# Altium PCB CumLED.PcbDoc
Units mil, origin at the board's own origin, x right, y up, seen from the top; angles counter-clockwise.
Board outline 2755.91 x 2755.91 mil, 2 copper layers (Top Layer, Bottom Layer); 7 components, 9 nets, 17 pads, 0 vias.
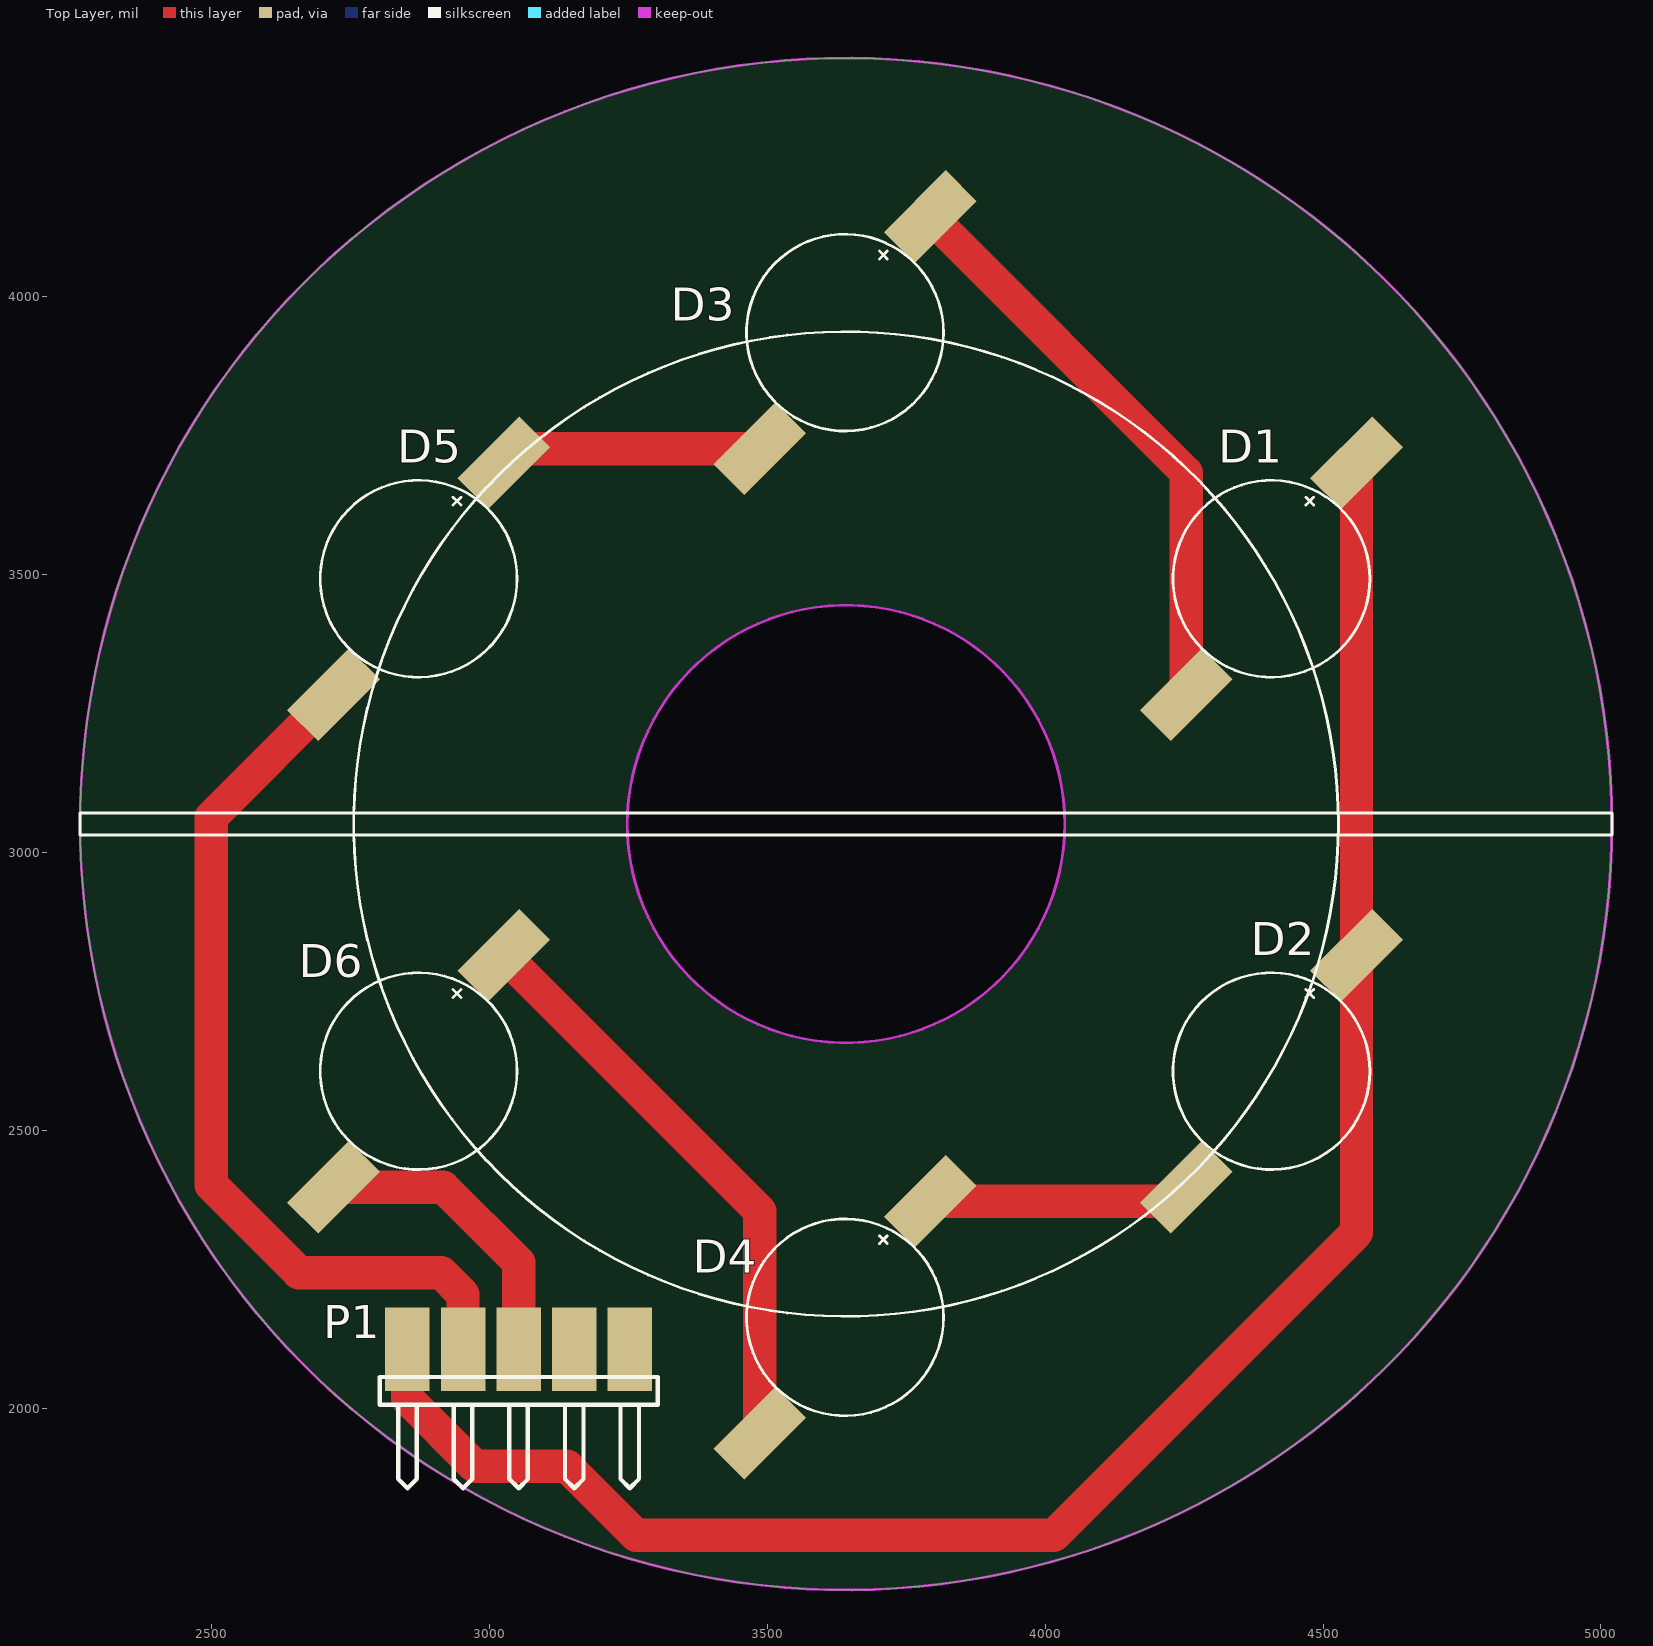
[diagram p0: Top Layer view]
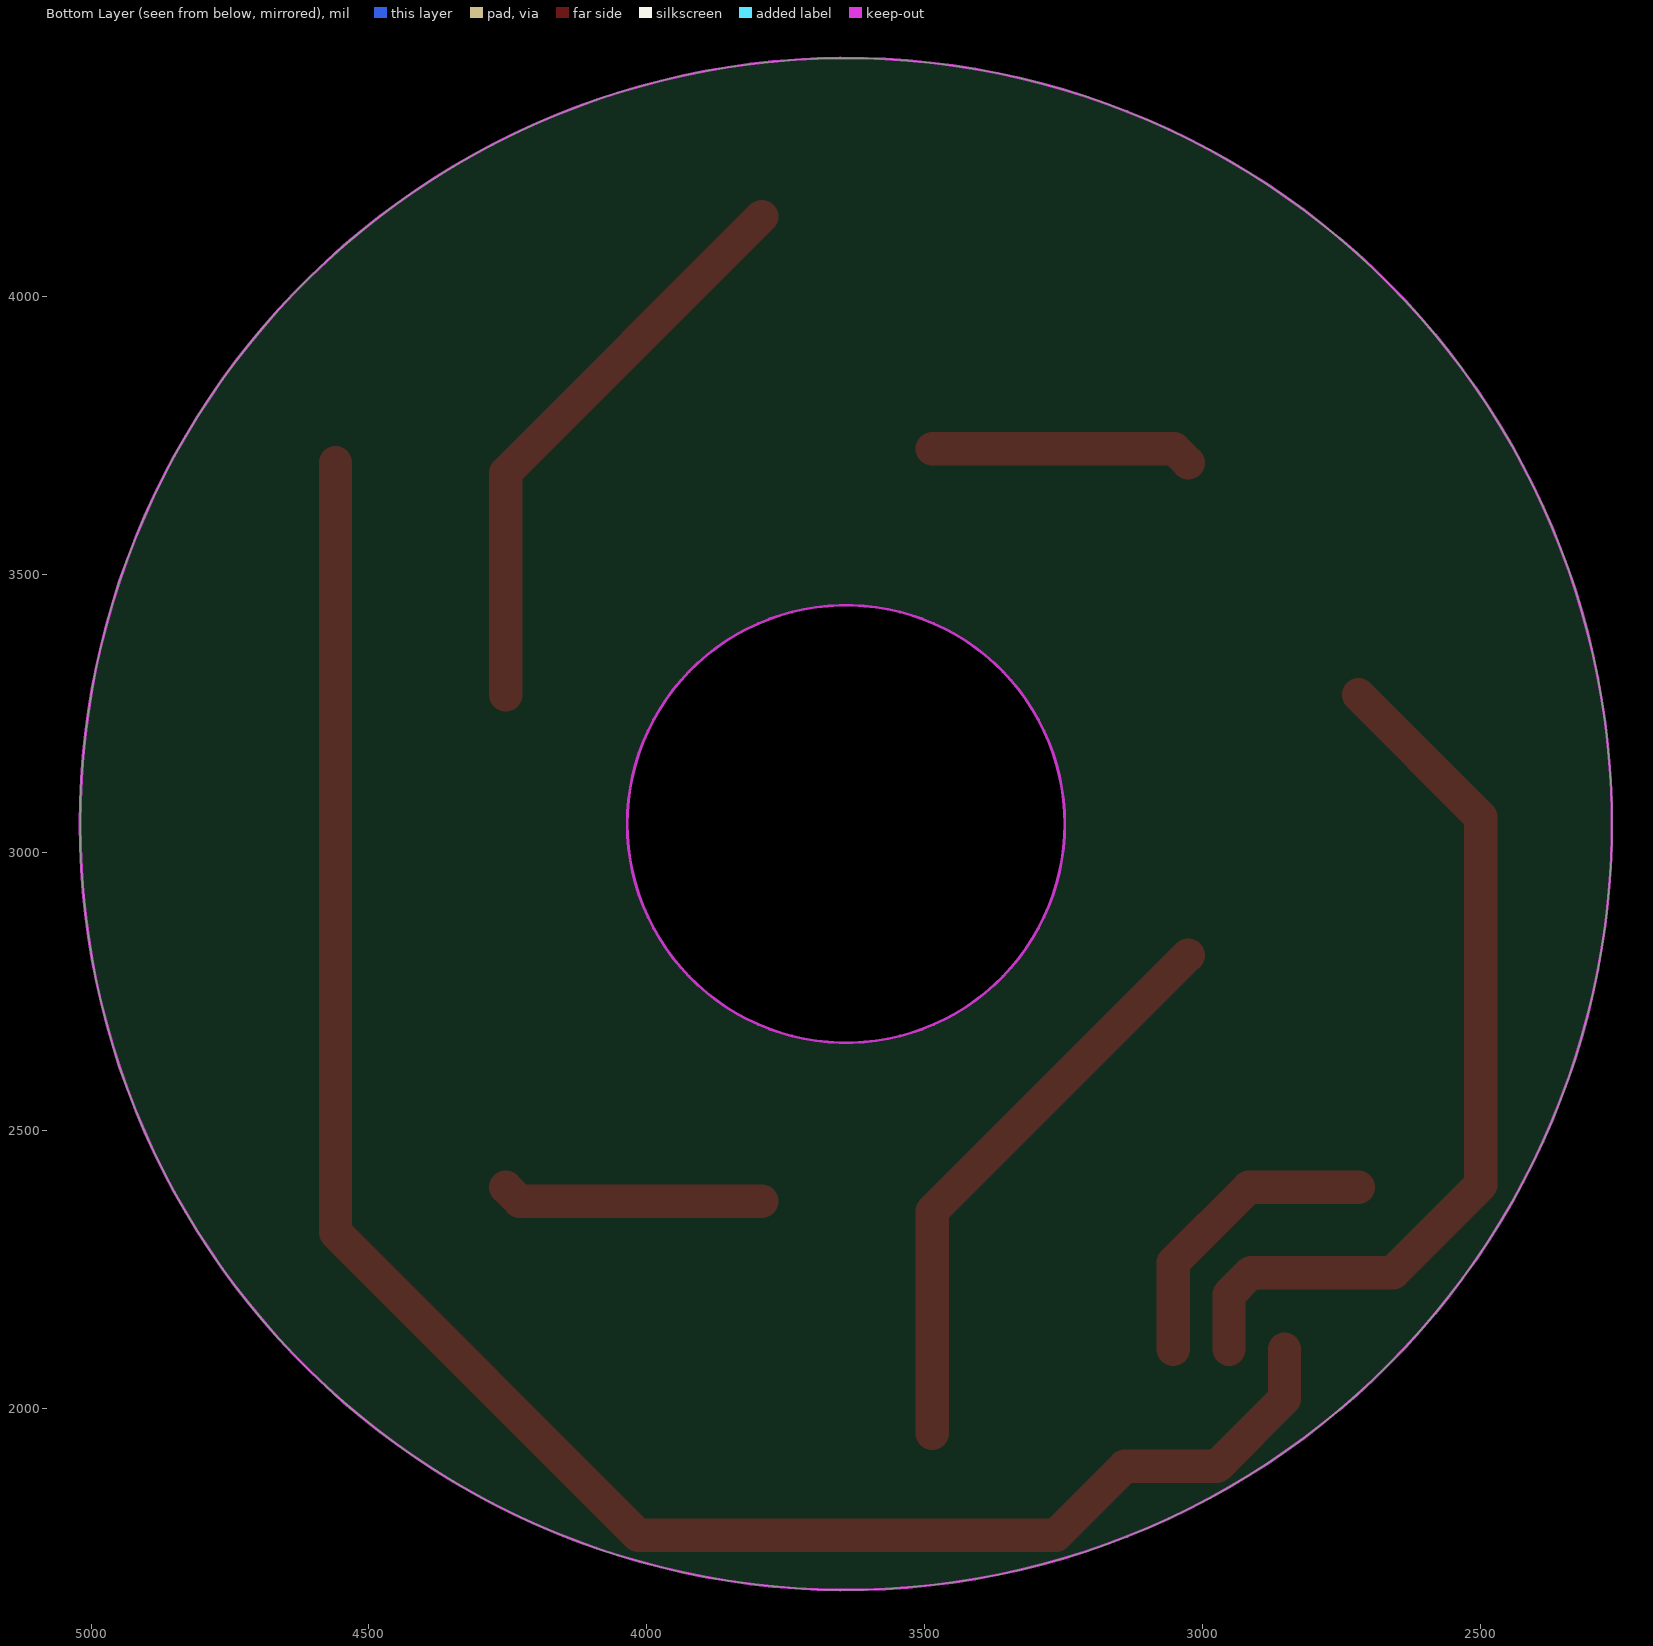
[diagram p1: Bottom Layer view, seen from below]
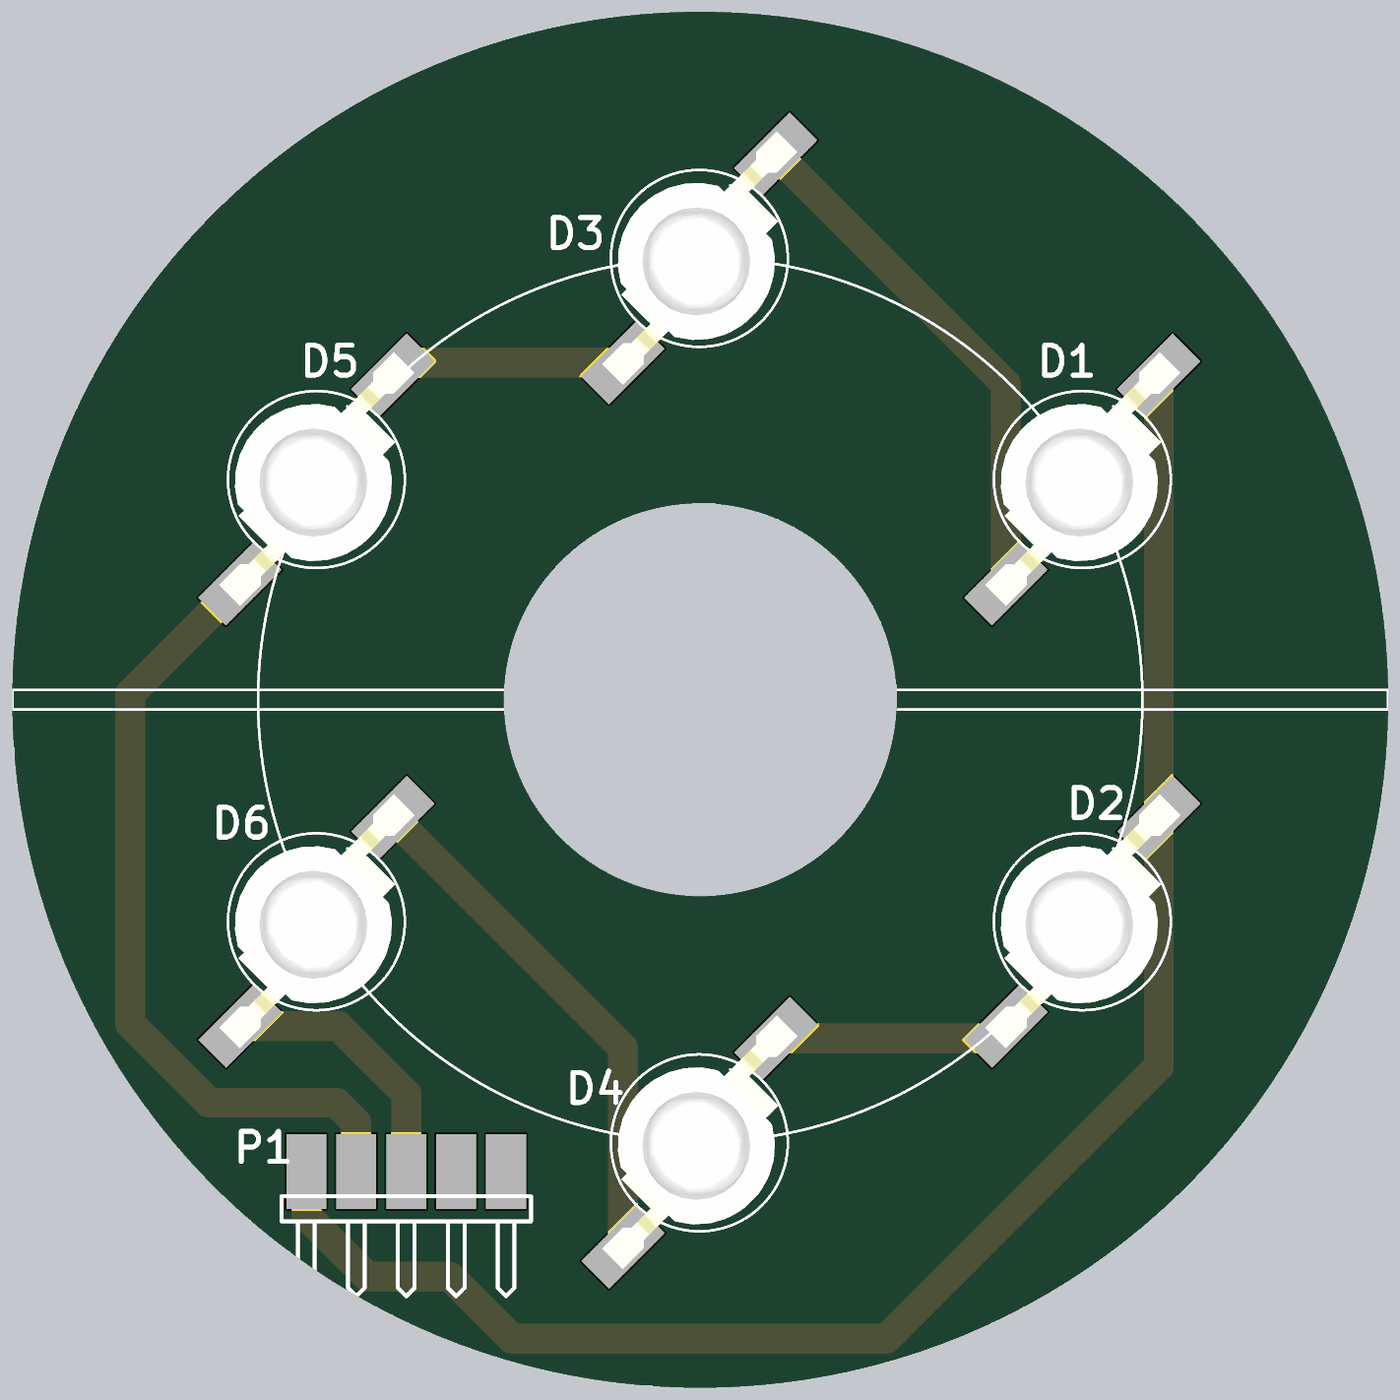
[diagram p2: 3D render of the assembled board from above, using the file's embedded part models]

## Layer stack, top to bottom
Top Solder: solder mask 0.4, Solder Resist, Dk 3.5
Top Layer: signal copper 1.4
Dielectric 1: dielectric 12.6, FR-4, Dk 4.8
Bottom Layer: signal copper 1.4
Bottom Solder: solder mask 0.4, Solder Resist, Dk 3.5

## Board outline
2263.78,3051.18 ccw(c3641.73,3051.18) 3641.73,1673.23 ccw(c3641.73,3051.18) 5019.69,3051.18 ccw(c3641.73,3051.18) 3641.73,4429.13 ccw(c3641.73,3051.18)
cut-out: 3248.03,3051.18 ccw(c3641.73,3051.18) 3641.73,2657.48 ccw(c3641.73,3051.18) 4035.43,3051.18 ccw(c3641.73,3051.18) 3641.73,3444.88 ccw(c3641.73,3051.18)

## Design rules (kind name [scope] priority, off if disabled: settings)
Clearance [All] p1: gap=10 ignorepadtopadclearanceinfootprint=FALSE except(0: Arc-Hole Track-Hole SMDPad-Hole THPad-Hole Via-Hole Fill-Hole Poly-Hole Region-Hole Text-Hole)
PolygonConnect [All] p1: connectstyle=Relief reliefconductorwidth=10 reliefentries=4 polygonreliefangle="90 Angle" airgapwidth=10
RoutingVias [All] p1: holewidth=28 width=50 viastyle="Through Hole" minholewidth=28 minwidth=50 maxholewidth=28 maxwidth=50
SolderMaskExpansion [All] p1: expansion=4
Width [All] p1: maxlimit=200 minlimit=10 preferedwidth=100
30 further rules are at their usual default settings.

## Components (designator, comment, footprint, x,y, rotation, side; value= is the part's Value field where it differs from the comment)
D1 "LED dán 0805 RED" LED_LUXEON 4408.88,3494.09 r225 top value=RED
D2 "LED dán 0805 RED" LED_LUXEON 4408.88,2608.27 r225 top value=RED
D3 "LED dán 0805 RED" LED_LUXEON 3641.73,3937.01 r225 top value=RED
D4 "LED dán 0805 RED" LED_LUXEON 3641.73,2165.35 r225 top value=RED
D5 "LED dán 0805 RED" LED_LUXEON 2874.58,3494.09 r225 top value=RED
D6 "LED dán 0805 RED" LED_LUXEON 2874.58,2608.27 r225 top value=RED
P1 "Jump đực chân thẳng, 2.54mm 5P" HDR1X5H 2852.76,2106.3 r0 top value=5P

## Footprints (in the part's own frame and the unit in brackets; to place one, negate y for a bottom-side part, rotate by r counter-clockwise, add the part's x,y. Pads: shape width x height; smd on the part's side, far side on the other; paste and mask are expansions set on the pad)
HDR1X5H [mil] "Connector; Header; 5 Position; Right Angle"
  rect 80x150 smd: 1(0,0) 2(100,0) 3(200,0) 4(300,0) 5(400,0)
  silkscreen extent -50,-250 450,-50
LED_LUXEON [mm]
  rect 4x2 smd: 1(-6.437,-1) 2(6.563,1)
  silkscreen extent -4.43,-4.5 4.56,4.5, body extent -7.31,-4 7.37,4, height 5.96

## Part data
D1 D2 D3 D4 D5 D6: library part LED0, "Typical INFRARED GaAs LED", Type1="LED dán 0805", Type2="LED chân c?m 3mm", Type3="LED chân c?m 5mm"
P1: library part "Header 5H", "Header, 5-Pin, Right Angle", LatestRevisionDate=17-Jul-2002, LatestRevisionNote="Re-released for DXP Platform.", Publisher="Altium Limited"

## Nets (pads, with @x,y where several pads share a name; then routed paths per layer and width w, separated by ;. In a path a pad name is that pad's centre, name@x,y a point inside that pad or via, vN(x,y) a via of type N, cw(c..) or ccw(c..) an arc to the next point about the centre after c; other vN are vias at no path point)
GND: P1.5
LAMP_TEMP_ADC: P1.4
LED_LAMP1: D5.2 P1.2 | length 1605.7
  Top Layer w60: D5.2 2500,3063.83 2500,2401.57 2657.48,2244.09 2913.39,2244.09 2952.76,2204.72 P1.2
LED_LAMP2: D6.2 P1.3 | length 545.1
  Top Layer w60: D6.2 2917.24,2397.72 3052.76,2262.2 P1.3
NetD1_2: D1.2 D3.1 | length 1051.4
  Top Layer w60: D3.1 4254.01,3683.12 D1.2
NetD2_2: D2.2 D4.1 | length 471.4
  Top Layer w60: D4.1 4228.68,2372.39 D2.2
NetD3_2: D3.2 D5.1 | length 471.4
  Top Layer w60: D5.1 3051.27,3726.46 D3.2
NetD4_2: D4.2 D6.1 | length 1051.4
  Top Layer w60: D6.1 3486.86,2354.38 D4.2
POWER: D1.1 D2.1 P1.1 | length 3508.9
  Top Layer w60: P1.1 2852.76,2017.13 2974.46,1895.43 3140.07,1895.43 3263.85,1771.65 4015.75,1771.65 4560.24,2316.15 D2.1 D1.1

## Keep-outs
Keep-Out Layer:
  circle w5: c3641.73,3051.18 r393.7
  circle w5: c3641.73,3051.18 r1377.95
  pour cut-out: 3248.03,3051.18 ccw(c3641.73,3051.18) 3641.73,2657.48 ccw(c3641.73,3051.18) 4035.43,3051.18 ccw(c3641.73,3051.18) 3641.73,3444.88 ccw(c3641.73,3051.18)

## Silkscreen, mask and mechanical layers (free items; w line width, h text height)
Top Overlay:
  circle w5: c3641.73,3051.18 r885.83
  lines w5: 2263.78,3031.5 2263.78,3070.87 5019.69,3070.87 5019.69,3031.5 2263.78,3031.5